# Altium PCB Bluetooth Receiver.PcbDoc
Units mil, origin at the board's own origin, x right, y up, seen from the top; angles counter-clockwise.
Board outline 6000 x 4000 mil, 2 copper layers (Top Layer, Bottom Layer); 31 components, 26 nets, 171 pads, 34 vias.
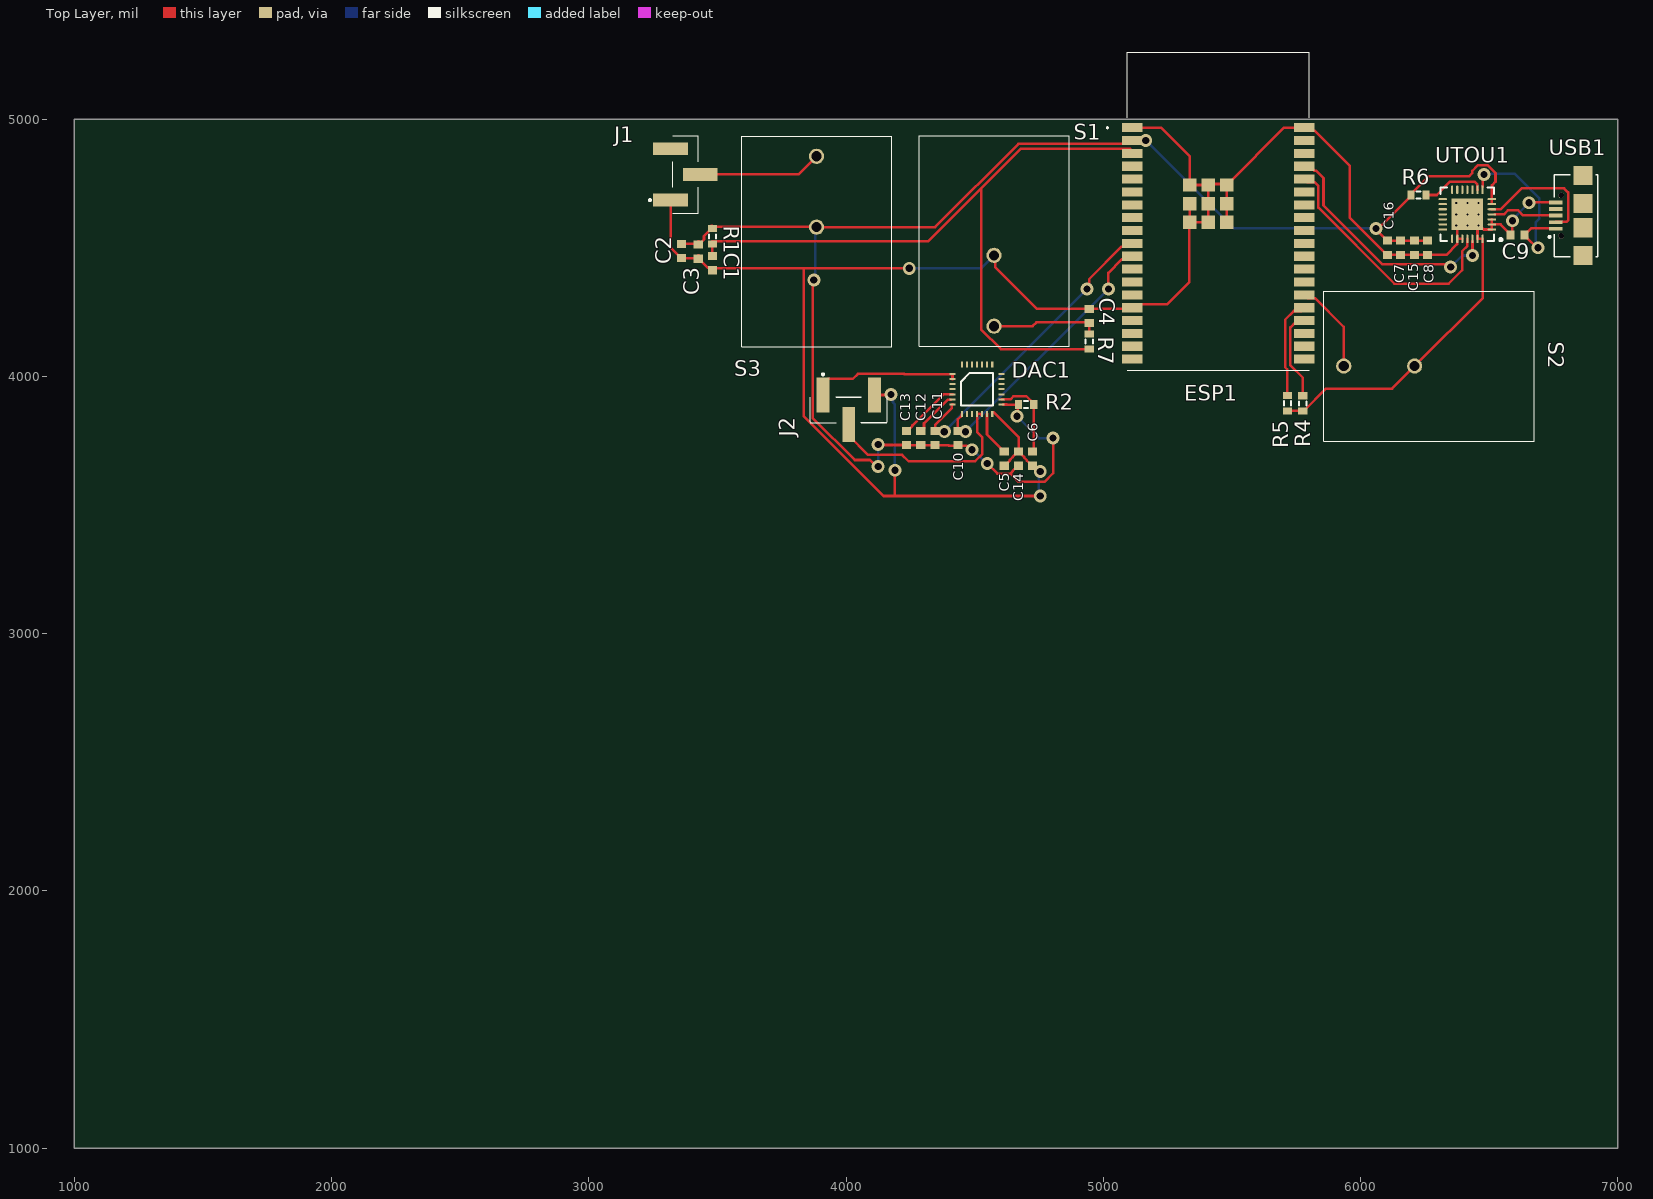
[diagram p0: Top Layer view]
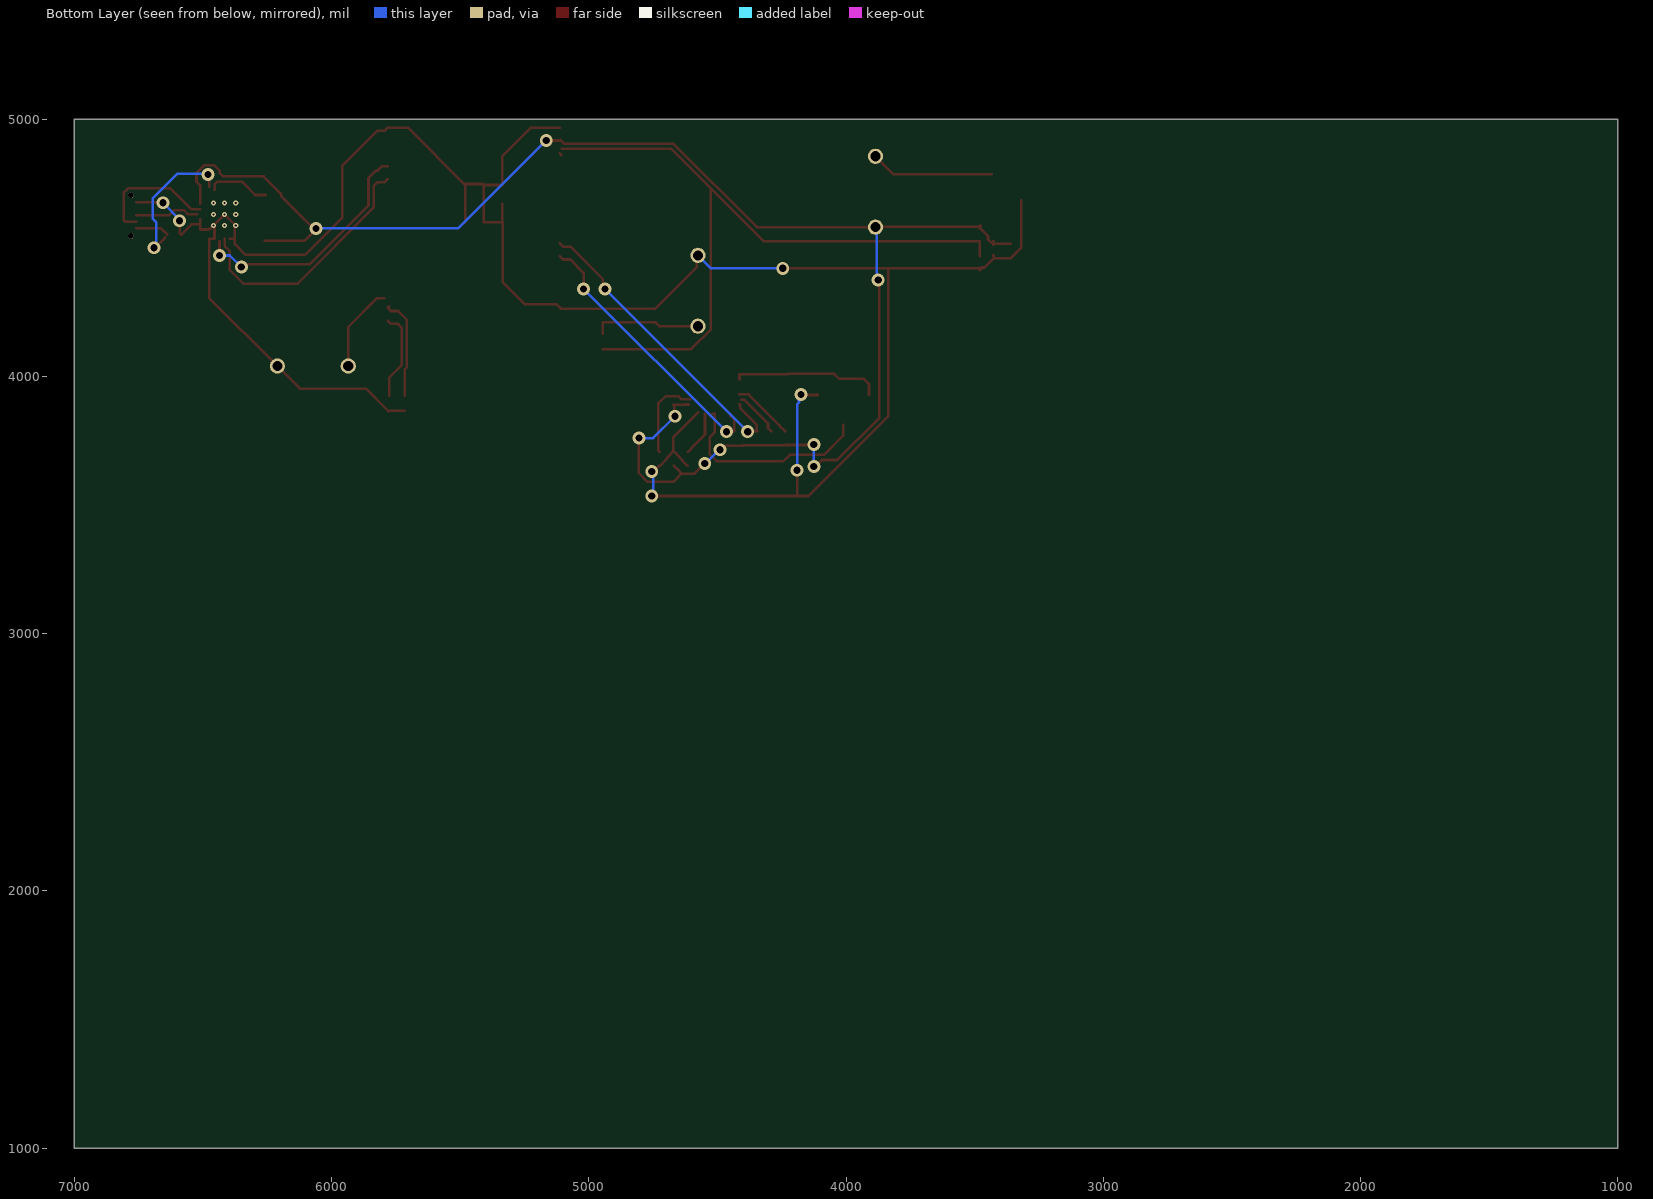
[diagram p1: Bottom Layer view, seen from below]

## Layer stack, top to bottom
Top Solder: solder mask 0.4, Solder Resist, Dk 3.5
Top Layer: signal copper 1.4
Dielectric 1: dielectric 12.6, FR-4, Dk 4.8
Bottom Layer: signal copper 1.4
Bottom Solder: solder mask 0.4, Solder Resist, Dk 3.5

## Board outline
1000,1000 7000,1000 7000,5000 1000,5000

## Design rules (kind name [scope] priority, off if disabled: settings)
Clearance [All] p1: gap=5 ignorepadtopadclearanceinfootprint=FALSE except(0: Arc-Hole Track-Hole SMDPad-Hole THPad-Hole Via-Hole Fill-Hole Poly-Hole Region-Hole Text-Hole)
PolygonConnect [All] p1: connectstyle=Relief reliefconductorwidth=10 reliefentries=4 polygonreliefangle="90 Angle" airgapwidth=10
RoutingVias [All] p1: holewidth=28 width=50 viastyle="Through Hole" minholewidth=28 minwidth=50 maxholewidth=28 maxwidth=50
SolderMaskExpansion [All] p1: expansion=4 istentingtop=FALSE
Width [All] p1: maxlimit=10 minlimit=10 preferedwidth=10
30 further rules are at their usual default settings.

## Components (designator, comment, footprint, x,y, rotation, side; value= is the part's Value field where it differs from the comment)
C1 "Cap" 1608[0603] 3480.63,4440 r90 top value=1uF
C2 "Cap" 1608[0603] 3360.63,4487.56 r90 top value=0.1uF
C3 "Cap" 1608[0603] 3425.63,4485 r90 top value=22uF
C4 "Cap" 1608[0603] 4945.63,4235 r90 top value=0.1uF
C5 "Cap" 1608[0603] 4615,3680 r90 top value=1.5uF
C6 "Cap" 1608[0603] 4725,3680 r270 top value=0.1uF
C7 "Cap" 1608[0603] 6155.63,4500 r90 top value=0.1uF
C8 "Cap" 1608[0603] 6260.63,4500 r90 top value=4.7uF
C9 "Cap" 1608[0603] 6610.63,4550 r0 top value=1uF
C10 "Cap" 1608[0603] 4435,3760 r90 top value=4.7uF
C11 "Cap" 1608[0603] 4345.63,3760 r270 top value=4.7uF
C12 "Cap" 1608[0603] 4290.63,3760 r90 top value=4.7uF
C13 "Cap" 1608[0603] 4235.63,3760 r270 top value=4.7uF
C14 "Cap" 1608[0603] 4670,3680 r270 top value=1.5uF
C15 "Cap" 1608[0603] 6210.63,4500 r270 top value=0.1uF
C16 "Cap" 1608[0603] 6105.63,4500 r270 top value=1uF
DAC1 "DAC6320" DAC63202 4414.06,4009.05 r0 top
ESP1 "ESP32-WROVER-E__16MB_" ESP32WROVERE16MB 5112.64,4671.65 r0 top
J1 "TSM-103-01-L-SV-P-TR" TSM10301LSVPTR 3375.63,4785 r270 top
J2 "TSM-103-01-L-SV-P-TR" TSM10301LSVPTR 4010.63,3870 r180 top
R1 "Res3" J1-0603 3480.63,4544.53 r270 top value=10K
R2 "Res3" J1-0603 4700.47,3890 r0 top value=10K
R4 "Res3" J1-0603 5775.63,3895 r270 top value=10K
R5 "Res3" J1-0603 5715.63,3895.47 r270 top value=10K
R6 "Res3" J1-0603 6225.63,4705 r0 top value=10K
R7 "Res3" J1-0603 4945.63,4135.47 r270 top value=4.7K
S1 "EN" R1966ABLKBLKEF 4575.63,4470.59 r270 top
S2 "BOOT" R1966ABLKBLKEF 6210.63,4040 r180 top
S3 "ON/OFF" R1966ABLKBLKEF 3885.63,4580 r90 top
USB1 "UJ2-MIBH-G-SMT-TR" CUI_UJ2-MIBH-G-SMT-TR 6865,4625 r90 top
UTOU1 "CP2101-GM" SLAB-QFN-28-3125x3125TP_A_N 6415.63,4630 r180 top

## Footprints (in the part's own frame and the unit in brackets; to place one, negate y for a bottom-side part, rotate by r counter-clockwise, add the part's x,y. Pads: shape width x height; smd on the part's side, far side on the other; paste and mask are expansions set on the pad)
1608[0603] [mm] "Chip Capacitor, Body 1.6x0.8mm, IPC High Density"
  rect 0.8x0.9 smd: 1(-0.7,0) 2(0.7,0)
  body extent -0.87,-0.48 0.87,0.48, height 1.3
CUI_UJ2-MIBH-G-SMT-TR [mm]
  rect 0.373x1.35 smd: 1(-1.3,2.675) 2(-0.65,2.675) 3(0,2.675) 4(0.65,2.675) 5(1.3,2.675)
  rect 1.9x1.9 smd: S1(-3.95,0) S2(-1.2,0) S3(1.2,0) S4(3.95,0)
  round 0.549 hole 0.55 unplated: ""(-2,2.15) ""(2,2.15)
  silkscreen extent -4.05,-1.45 4.05,3.4
DAC63202 [mm]
  rect 0.6x0.2 smd: 1(0,0) 2(0,-0.5) 3(0,-1) 4(0,-1.5) 5(0,-2) 6(0,-2.5) 7(0,-3) 15(4.85,-3) 16(4.85,-2.5) 17(4.85,-2) 18(4.85,-1.5) 19(4.85,-1) 20(4.85,-0.5) 21(4.85,0)
  rect 0.2x0.6 smd: 8(0.925,-3.925) 9(1.425,-3.925) 10(1.925,-3.925) 11(2.425,-3.925) 12(2.925,-3.925) 13(3.425,-3.925) 14(3.925,-3.925) 22(3.925,0.925) 23(3.425,0.925) 24(2.925,0.925) 25(2.425,0.925) 26(1.925,0.925) 27(1.425,0.925) 28(0.925,0.925)
  silkscreen extent 0.83,-3.09 4.01,0.09
ESP32WROVERE16MB [mm]
  rect 2x0.9 smd: 1(0,7.5) 2(0,6.23) 3(0,4.96) 4(0,3.69) 5(0,2.42) 6(0,1.15) 7(0,-0.12) 8(0,-1.39) 9(0,-2.66) 10(0,-3.93) 11(0,-5.2) 12(0,-6.47) 13(0,-7.74) 14(0,-9.01) 15(0,-10.28) 16(0,-11.55) 17(0,-12.82) 18(0,-14.09) 19(0,-15.36) 20(17,-15.36) 21(17,-14.09) 22(17,-12.82) 23(17,-11.55) 24(17,-10.28) 25(17,-9.01) 26(17,-7.74) 27(17,-6.47) 28(17,-5.2) 29(17,-3.93) 30(17,-2.66) 31(17,-1.39) 32(17,-0.12) 33(17,1.15) 34(17,2.42) 35(17,3.69) 36(17,4.96) 37(17,6.23) 38(17,7.5)
  rect 1.33x1.33 smd: 39(5.665,1.835) 40(7.5,1.835) 41(9.335,1.835) 42(5.665,0) 43(7.5,0) 44(9.335,0) 45(5.665,-1.835) 46(7.5,-1.835) 47(9.335,-1.835)
  silkscreen extent -2.5,-16.46 17.5,14.94, body extent -0.51,-16.46 17.49,14.94, height 3.31
J1-0603 [mm] "Chip Resistor, Body 1.6x0.8mm, IPC High Density"
  rect 0.7x0.9 smd: 1(-0.75,0) 2(0.75,0)
  silkscreen extent -0.2,-0.35 0.2,0.35, body extent -0.85,-0.48 0.85,0.48, height 0.9
R1966ABLKBLKEF [mm]
  round 1.5 hole 1: 1(0,0) 2(7,0)
  silkscreen extent -11.8,-7.4 9,7.4
SLAB-QFN-28-3125x3125TP_A_N [mm] "QFN, 28-Leads, Body 5x5mm, Pitch 0.5mm, Thermal Pad 3.13x3.13mm, IPC Medium Density"
  oval 0.85x0.2 smd: 1(-2.425,1.5) 2(-2.425,1) 3(-2.425,0.5) 4(-2.425,0) 5(-2.425,-0.5) 6(-2.425,-1) 7(-2.425,-1.5) 15(2.425,-1.5) 16(2.425,-1) 17(2.425,-0.5) 18(2.425,0) 19(2.425,0.5) 20(2.425,1) 21(2.425,1.5)
  oval 0.2x0.85 smd: 8(-1.5,-2.425) 9(-1,-2.425) 10(-0.5,-2.425) 11(0,-2.425) 12(0.5,-2.425) 13(1,-2.425) 14(1.5,-2.425) 22(1.5,2.425) 23(1,2.425) 24(0.5,2.425) 25(0,2.425) 26(-0.5,2.425) 27(-1,2.425) 28(-1.5,2.425)
  rect 3.13x3.13 smd: 29(0,0)
  silkscreen extent -3.42,-2.65 2.65,2.65, body extent -2.5,-2.5 2.5,2.5, height 1
TSM10301LSVPTR [mm]
  rect 1.27x3.43 smd: 1(2.54,-1.46) 2(0,1.46) 3(-2.54,-1.46)
  silkscreen extent -3.81,-3.6 3.81,1.27

## Part data
C1 C2 C3 C4 C5 C6 C7 C8 C9 C10 C11 C12 C13 C14 C15 C16: library part "Cap Semi", "Capacitor (Semiconductor SIM Model)", LatestRevisionDate=29-May-2009, LatestRevisionNote="IPC-7351 Footprint Added.", PackageDescription="Chip Capacitor", PackageReference=C1206, Published=8-Jun-2000, Publisher="Altium Limited"
ESP1: "Integrated Circuit", Manufacturer_Name="Espressif Systems", Manufacturer_Part_Number="ESP32-WROVER-E (16MB)", Mouser Part Number=356-ESP32WRVE22864PC, Datasheet Link=https://www.espressif.com/sites/default/files/documentation/esp32-wrover_datasheet_en.pdf, Height=3.4mm, Mouser Price/Stock=https://www.mouser.co.uk/ProductDetail/Espressif-Systems/ESP32-WROVER-E-16MB?qs=GBLSl2Akirv1e4kp%252BlJr4g%3D%3D
J1 J2: "Connector", Manufacturer_Name=SAMTEC, Mouser Part Number=200-TSM10301LSVPTR, Arrow Part Number=TSM-103-01-L-SV-P-TR, Arrow Price/Stock=https://www.arrow.com/en/products/tsm-103-01-l-sv-p-tr/samtec?region=europe, Datasheet Link=https://datasheet.datasheetarchive.com/originals/dk/DKDS40/DSANUWW0019078.pdf, Manufacturer_Part_Number=TSM-103-01-L-SV-P-TR, Mouser Price/Stock=https://www.mouser.co.uk/ProductDetail/Samtec/TSM-103-01-L-SV-P-TR?qs=DZ6FV2pdG5tjRaLOEfFPgw%3D%3D
R1 R2 R4 R5 R6 R7: "Resistor", LatestRevisionDate=29-May-2009, LatestRevisionNote="IPC-7351 Footprint Added.", PackageDescription="Chip Resistor", PackageReference=J1-0603, Published=8-Jun-2000, Publisher="Altium Limited"
S1 S2 S3: library part SW-PB, "Switch", LatestRevisionDate=17-Jul-2002, LatestRevisionNote="Re-released for DXP Platform.", PackageDescription="Switch; 2 Leads", PackageReference=SPST-2, Published=24-Mar-1999, Publisher="Altium Limited"
USB1: "USB micro B type receptacle", Package=None, Availability=Unavailable, MP=UJ2-MIBH-G-SMT-TR, Price=None
UTOU1: "Single-Chip USB to UART Bridge, 512 Bytes EEPROM, -40 to 85 degC, 28-pin QFN, Tube", Manufacturer="Silicon Labs", ComponentLink1Description="Manufacturer URL", ComponentLink1URL=http://www.silabs.com/, ComponentLink2Description=Datasheet, ComponentLink2URL=http://www.silabs.com/Support%20Documents/TechnicalDocs/CP2101.pdf, ComponentLink3Description="Package Specification", ComponentLink3URL=http://www.silabs.com/Support%20Documents/TechnicalDocs/C8051F35x.pdf, DatasheetVersion="Rev. 1.8", EEPROM="512 Bytes", Internal Oscillator=TRUE, Mounting Technology="Surface Mount", PackageDescription="28-Pin Quad-Flat No-Leads Package, Body 5 x 5 mm, Pitch 0.5 mm", PackageReference=QFN-28, PartNumber=CP2101-GM, Sub-Family="USB Bridges"

## Via types
v1: diameter 50, hole 28, Top Layer to Bottom Layer, 25 vias
v2: diameter 19.68, hole 7.87, Top Layer to Bottom Layer, 9 vias

## Nets (pads, with @x,y where several pads share a name; then routed paths per layer and width w, separated by ;. In a path a pad name is that pad's centre, name@x,y a point inside that pad or via, vN(x,y) a via of type N, cw(c..) or ccw(c..) an arc to the next point about the centre after c; other vN are vias at no path point)
3V3: C2.2 C3.2 C7.2 C8.2 C10.1 C11.2 C12.1 C13.2 C14.2 C15.1 C16.1 DAC1.15 ESP1.2 R1.1 R2.1 R6.1 S3.1 UTOU1.6 UTOU1.7 | length 6340.3
  Top Layer w10: C2.2 3425.04,4515.12 3427.6,4512.56 3447.91,4532.87 3447.91,4545.28 3476.69,4574.06 R1.1 ; C3.2@3425.63,4525 C3.2@3427.6,4525 ; R1.1@3476.69,4584.53 3480.63,4584.53 3482.89,4582.26 3883.37,4582.26 S3.1 4346.48,4580 4670.69,4904.21 5094.72,4904.21 5110.04,4919.53 ESP1.2 v1(5165.53,4916.93) ; v1(3875,4375) 3870.63,4370.63 3870.63,3838.79 4034.42,3675 4093.43,3675 4118.43,3650 v1(4125,3650) ; v1(4125,3735) 4126.66,3733.34 4234.73,3733.34 C13.2 C12.1 C11.2 4398.19,3732.44 4400.63,3730 4469.48,3730 4484.48,3715 v1(4490,3715) ; v1(4549.07,3660.93) 4588.31,3621.69 4638.93,3621.69 ; DAC1.15@4611.81,3890.63 4624.37,3890.63 4625,3890 R2.1 4667.97,3887.03 4667.97,3847.97 v1(4665,3845) ; C14.2 4668.03,3652.44 4647.72,3632.13 4647.72,3630.48 4638.93,3621.69 ; v1(4805,3760) 4805,3623.43 4771.57,3590 4670.62,3590 4638.93,3621.69 ; C8.2@6258.66,4527.56 C15.1 6208.66,4527.56 6165.63,4527.56 C16.1 6103.66,4527.56 6060.63,4570.59 v1(6060.63,4575) 6070.04,4575 6196.1,4701.06 R6.1 6196.1,4708.94 6264.37,4777.2 6421.51,4777.2 6434.56,4790.25 6434.56,4798.94 6455.61,4820 6495,4820 6525,4790 6525,4756.7 6511.1,4742.8 UTOU1.7 ; UTOU1.6@6510.63,4670.43 UTOU1.7@6510.63,4688.58
  Bottom Layer w10: v1(3875,4375) 3880.32,4380.31 3880.32,4574.69 S3.1 ; v1(4125,3650) v1(4125,3735) ; v1(4490,3715) 4492.5,3715 4546.57,3660.93 v1(4549.07,3660.93) ; v1(4665,3845) 4750,3760 v1(4805,3760) ; v1(5165.53,4916.93) 5507.46,4575 v1(6060.63,4575)
"ANALOG IN": 
"Channel 1": DAC1.1 DAC1.2 J2.1 | length 582.6
  Top Layer w10: J2.1 3910.63,3970 3930.63,3990 4026.24,3990 4046.24,4010 4226.27,4010 4227.21,4009.05 DAC1.1 DAC1.2
"Channel 2": DAC1.11 DAC1.12 J2.2 | length 802.7
  Top Layer w10: J2.2 4010.63,3770 4085.63,3695 4218.39,3695 4243.39,3670 4501.57,3670 4530,3698.43 4530,3762.84 4509.53,3783.31 DAC1.11 4510,3855 4520,3855 4528.15,3846.85 DAC1.12@4528.15,3847.72
D+: USB1.3 UTOU1.4 | length 251.1
  Top Layer w10: UTOU1.4@6522.83,4630 6557.52,4630 6572.52,4645 6613.37,4645 6632.11,4626.26 USB1.3@6759.96,4626.26
D-: USB1.2 UTOU1.5 | length 494.6
  Top Layer w10: UTOU1.5 6511.42,4650 6545.63,4650 6626.46,4730.83 6791.33,4730.83 6807.39,4714.76 6807.39,4606.53 6801.54,4600.67 USB1.2@6759.96,4600.67
EN: C1.2 ESP1.3 R1.2 R7.2 | length 2830.5
  Top Layer w10: C1.2 R1.2 ; R1.2@3480.63,4525.47 4320.24,4525.47 4525.63,4730.87 ; R7.2 4601.71,4105.94 4525.63,4182.03 4525.63,4730.87 ; ESP1.3@5105.63,4884.21 4678.98,4884.21 4525.63,4730.87 ; ESP1.3@5106.18,4860.47 ESP1.3
GND: C1.1 C2.1 C3.1 C4.2 C5.1 C6.2 C7.1 C8.1 C9.1 C14.1 C15.2 C16.2 DAC1.14 ESP1.1 ESP1.15 ESP1.38 ESP1.39 ESP1.40 ESP1.41 ESP1.42 ESP1.43 ESP1.44 ESP1.45 ESP1.46 ESP1.47 J1.1 J2.3 R4.2 R5.2 S1.1 S2.1 USB1.5 UTOU1.1 UTOU1.2 UTOU1.3 UTOU1.23 UTOU1.24 UTOU1.27 UTOU1.28 UTOU1.29 | length 9420.7
  Top Layer w10: J1.1 3318.15,4500.51 3358.66,4460 C2.1 3425.04,4460 3461.85,4423.19 3469.88,4423.19 C1.1 ; C3.1@3425.63,4469.88 C3.1@3427.6,4469.88 ; C1.1@3480.63,4422.44 3483.07,4420 3835,4420 ; J2.3@4113.15,3930 J2.3 4172.48,3927.48 v1(4175,3930) ; v1(4190,3635) 4190,3535 ; v1(4245.63,4420) 3835,4420 ; 4575,3860 4671.97,3763.03 C14.1@4671.97,3707.56 ; S1.1 4579.57,4466.65 4579.57,4426.06 4743.07,4262.56 C4.2 5108.27,4262.56 ESP1.15 5125.35,4279.65 5247.45,4279.65 5335.01,4367.2 5335.01,4598.75 ESP1.45 ; C5.1 4616.97,3652.44 4637.28,3672.76 4637.28,3675.16 4647.72,3685.6 4647.72,3687.24 4668.03,3707.56 C14.1 C14.1@4671.97,3707.56 ; v1(4755,3535) 4190,3535 ; v1(4755,3630) 4749.41,3630 4726.97,3652.44 C6.2 4723.03,3652.44 4702.72,3672.76 4702.72,3674.4 4692.28,3684.84 4692.28,3687.24 C14.1@4671.97,3707.56 ; ESP1.1 5225.28,4966.93 5335.67,4856.54 ESP1.39 ESP1.40 ; ESP1.42 ESP1.45 ; ESP1.47 ESP1.44 ESP1.41 ; ESP1.41@5480.16,4747.98 5411.99,4747.98 ESP1.40 ; ESP1.41@5484.24,4747.98 5703.19,4966.93 ESP1.38 5794.65,4954.21 5822.95,4954.21 5957.93,4819.23 5957.93,4618.17 6103.66,4472.44 C16.2 C15.2 C8.1 6334.06,4472.44 6375.51,4513.89 6375.51,4533.78 UTOU1.23 ; R5.2 5715.87,3865.71 5775.39,3865.71 R4.2 5779.57,3865.47 5866.53,3952.43 6123.06,3952.43 S2.1 6475.63,4305 6475.63,4533.58 UTOU1.28 UTOU1.27 UTOU1.29@6455,4586.69 ; UTOU1.24@6395.63,4535 6376.73,4535 UTOU1.23 ; UTOU1.3 UTOU1.2 ; v1(6590.63,4605) 6590.63,4557.56 C9.1 6583.07,4551.97 6544.41,4590.63 UTOU1.2 ; v1(6655.63,4675) 6656.85,4676.22 6758.74,4676.22 USB1.5@6759.96,4677.44 ; 3835,4420 3835,3846.13 4146.13,3535 4190,3535 ; ESP1.45 ESP1.46 ESP1.43 ESP1.40 ; UTOU1.23 6376.26,4590.63 v2(6415.63,4630) v2(6458.94,4586.69) 6472.24,4573.39 6476.93,4573.39 6479.37,4570.94 UTOU1.1 UTOU1.2
  Bottom Layer w10: v1(4175,3930) 4182.65,3922.35 4182.65,3898.82 4190,3891.47 v1(4190,3635) ; v1(4245.63,4420) 4525.04,4420 S1.1 ; v1(4755,3535) 4750,3540 4750,3625 v1(4755,3630) ; v1(6590.63,4605) 6590.63,4610 v1(6655.63,4675)
  other v2: 6372.32,4586.69 6415.63,4586.69 6372.32,4630 6458.94,4630 6372.32,4673.31 6415.63,4673.31 6458.94,4673.31
IO0: ESP1.25 S2.2 | length 338.9
  Top Layer w10: ESP1.25@5794.65,4304.21 5822.95,4304.21 5935.04,4192.12 S2.2
IO2: ESP1.24 R5.1 | length 401.6
  Top Layer w10: R5.1 5715.63,4026.64 5707.56,4034.72 5707.56,4220.86 5740.91,4254.21 5769.21,4254.21 ESP1.24 ESP1.24@5775.63,4273.23
IO15: ESP1.23 R4.1 | length 351.4
  Top Layer w10: R4.1 5775.63,3994.93 5727.56,4043 5727.56,4190.86 5740.91,4204.21 5769.21,4204.21 ESP1.23
IO25: C11.1 DAC1.7 ESP1.10 | length 1221.2
  Top Layer w10: v1(4382.28,3785) 4379.72,3787.56 C11.1 4347.45,3789.38 4347.45,3812.45 4411.8,3876.8 4411.8,3889.88 4412.99,3889.88 DAC1.7 ; v1(4937.28,4340) 4944.94,4347.65 4944.94,4377.53 5071.62,4504.21 5099.92,4504.21 ESP1.10
  Bottom Layer w10: v1(4382.28,3785) v1(4937.28,4340)
IO26: C10.2 DAC1.8 ESP1.11 | length 1072.7
  Top Layer w10: DAC1.8@4449.41,3853.46 DAC1.8 4450.47,3848.78 4435,3833.31 C10.2 4437.56,3785 v1(4465,3785) ; v1(5020,4340) 5020,4402.59 5071.62,4454.21 5099.92,4454.21 ESP1.11
  Bottom Layer w10: v1(4465,3785) v1(5020,4340)
NetC4_1: C4.1 R7.1 S1.2 | length 419.7
  Top Layer w10: S1.2 4725.63,4195 4740.63,4210 4943.07,4210 C4.1 R7.1
NetC5_2: C5.2 DAC1.13 | length 176.1
  Top Layer w10: DAC1.13 4548.15,3853.78 4548.15,3774.41 4602.28,3720.28 4602.28,3718.31 4613.03,3707.56 C5.2
NetC6_1: C6.1 DAC1.16 R2.2 | length 330.4
  Top Layer w10: DAC1.16 4638.87,3910.63 4650.95,3922.72 4701.22,3922.72 4730,3893.94 R2.2 4730,3712.56 C6.1
NetC12_2: C12.2 DAC1.6 | length 178.3
  Top Layer w10: C12.2 4292.6,3787.56 4303.35,3798.31 4303.35,3817.2 4396.03,3909.88 DAC1.6@4407.24,3909.88
NetC13_1: C13.1 DAC1.5 | length 238.5
  Top Layer w10: C13.1 4237.6,3787.56 4257.91,3807.87 4257.91,3809.52 4378.71,3930.32 DAC1.5
NetC20_1: 
NetJ1_2: J1.2 S3.2 | length 481.8
  Top Layer w10: J1.2 3815.04,4785 S3.2
NetJ3_2: 
NetR6_2: R6.2 UTOU1.9 | length 246.3
  Top Layer w10: R6.2 6296.53,4705 6348.73,4757.2 6443.16,4757.2 6454.25,4746.11 6454.25,4726.22 UTOU1.9
NetR12_2: 
RXD0: ESP1.34 UTOU1.25 | length 983.5
  Top Layer w10: ESP1.34 5794.65,4754.21 5822.95,4754.21 5836.3,4740.86 5836.3,4656.05 6132.35,4360 6342.2,4360 6395.63,4413.43 6395.63,4486.57 6415.63,4506.57 UTOU1.25
TXD0: ESP1.35 UTOU1.26 | length 952.1
  Top Layer w10: ESP1.35 5803.58,4816.93 5820.87,4799.65 5827.51,4799.65 5856.3,4770.86 5856.3,4664.33 6084.85,4435.78 6329.02,4435.78 6339.81,4425 v1(6350.63,4425) ; v1(6435.63,4470) UTOU1.26@6435.63,4525
  Bottom Layer w10: v1(6350.63,4425) 6395.63,4470 v1(6435.63,4470)
VBUS: C9.2 USB1.1 UTOU1.8 | length 690
  Top Layer w10: UTOU1.8@6474.56,4737.2 6474.56,4779.56 v1(6480,4785) ; C9.2 6638.19,4551.97 6648.94,4562.72 6650.91,4562.72 6663.27,4575.08 USB1.1@6759.96,4575.08 ; C9.2@6648.19,4540 6648.19,4538.03 6686.22,4500 v1(6690.63,4500)
  Bottom Layer w10: v1@6478.59,4786.41 v1(6480,4785) 6482.82,4787.82 6599.38,4787.82 6695.63,4691.57 6695.63,4613.7 6680.63,4598.7 v1@6680.63,4510
  other v1: 6480,4785
pads on no net: DAC1.3 DAC1.4 DAC1.9 DAC1.10 DAC1.17 DAC1.18 DAC1.19 DAC1.20 DAC1.21 DAC1.22 DAC1.23 DAC1.24 DAC1.25 DAC1.26 DAC1.27 DAC1.28 ESP1.4 ESP1.5 ESP1.6 ESP1.7 ESP1.8 ESP1.9 ESP1.12 ESP1.13 ESP1.14 ESP1.16 ESP1.17 ESP1.18 ESP1.19 ESP1.20 ESP1.21 ESP1.22 ESP1.26 ESP1.27 ESP1.28 ESP1.29 ESP1.30 ESP1.31 ESP1.32 ESP1.33 ESP1.36 ESP1.37 J1.3 USB1. USB1.4 USB1.S1 USB1.S2 USB1.S3 USB1.S4 UTOU1.10 UTOU1.11 UTOU1.12 UTOU1.13 UTOU1.14 UTOU1.15 UTOU1.16 UTOU1.17 UTOU1.18 UTOU1.19 UTOU1.20 UTOU1.21 UTOU1.22